# Altium PCB V1female.PcbDoc
Units mm, origin at the board's own origin, x right, y up, seen from the top; angles counter-clockwise.
Board outline 152.4 x 101.6 mm, 2 copper layers (Top Layer, Bottom Layer); 2 components, 2 nets, 18 pads, 42 vias.
Unrouted connection lines stored in the file: 4.
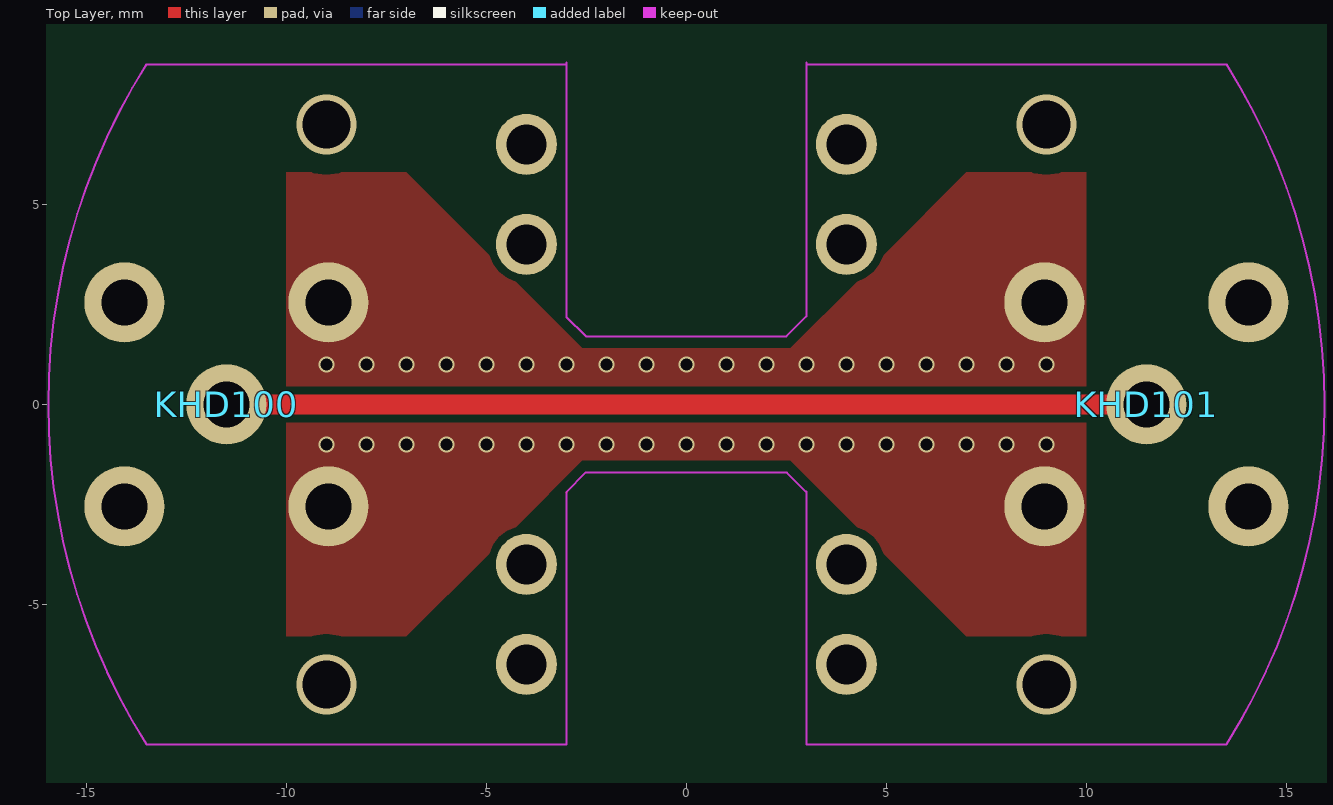
[diagram p0: Top Layer view]
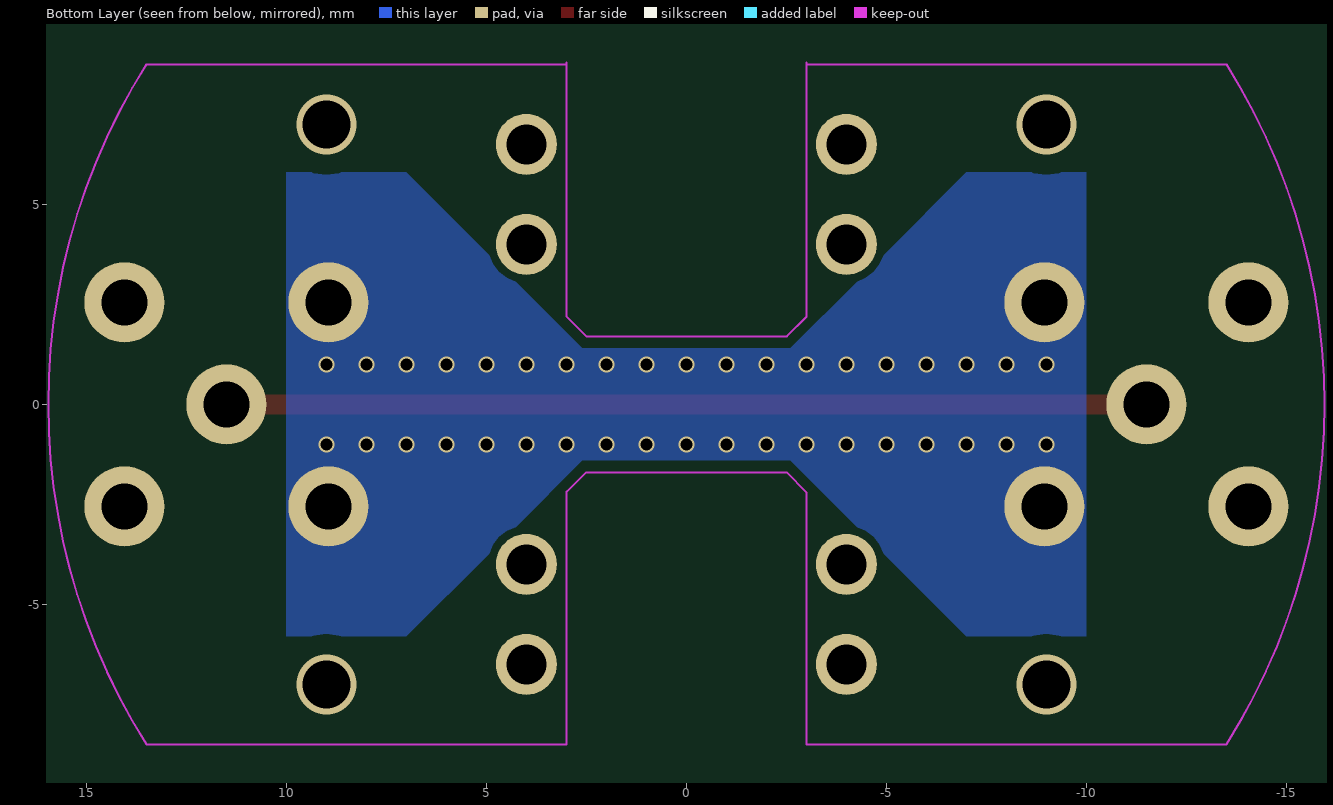
[diagram p1: Bottom Layer view, seen from below]

## Layer stack, top to bottom
Top Solder: solder mask 0.0102, Solder Resist, Dk 3.5
Top Layer: signal copper 0.0356
Dielectric1: dielectric 0.32, FR-4, Dk 4.8
Bottom Layer: signal copper 0.0356
Bottom Solder: solder mask 0.0102, Solder Resist, Dk 3.5

## Board outline
-74.041,-53.975 78.359,-53.975 78.359,47.625 -74.041,47.625

## Design rules (kind name [scope] priority, off if disabled: settings)
Clearance [All] p1: gap=0.2 ignorepadtopadclearanceinfootprint=FALSE except(0: Arc-Hole Track-Hole SMDPad-Hole THPad-Hole Via-Hole Fill-Hole Poly-Hole Region-Hole Text-Hole)
FabricationTestPointUsage TestPointUsage [All] p1: valid=0 allowmultiple=FALSE
FabricationTestpoint Testpoint [All] p1: side=3 testpointundercomponent=TRUE minsize=1.016 maxsize=2.54 preferedsize=1.524 minholesize=0 maxholesize=1.016 preferedholesize=0.813 testpointgrid=0.025 allowsidetop=TRUE allowsidebottom=TRUE usegrid=TRUE gridtolerance=0
HoleSize [All] p1: absolutevalues=TRUE maxlimit=2.54 minlimit=0.01 maxpercent=80.000 minpercent=20.000
HoleToHoleClearance [All] p1: gap=0.1 allowstackedmicrovias=TRUE
MinimumSolderMaskSliver [All] p1: minsoldermaskwidth=0.1
NetAntennae [All] p1: netantennaetolerance=0.1
PlaneConnect [All] p1: planeconnectstyle=Relief reliefexpansion=0.508 reliefentries=4 reliefconductorwidth=0.4 reliefairgap=0
PolygonConnect [All] p1: connectstyle=Direct reliefconductorwidth=0.254 reliefentries=4 polygonreliefangle="90 Angle" airgapwidth=0.254
RoutingVias [All] p1: holewidth=0.711 width=1.27 viastyle="Through Hole" minholewidth=0.05 minwidth=0.1 maxholewidth=0.711 maxwidth=1.27
SilkToSolderMaskClearance SilkscreenOverComponentPads [IsPad] p1: minsilkscreentomaskgap=0.254 clearancetoexposedcopper=TRUE
SolderMaskExpansion [All] p1: expansion=0
Width [All] p1: maxlimit=2 minlimit=0.1 preferedwidth=0.254
22 further rules are at their usual default settings.

## Components (designator, comment, footprint, x,y, rotation, side; value= is the part's Value field where it differs from the comment)
KHD100 "KHD100" 2.92-KHD100 -11.5,0 r0 top
KHD101 "KHD100" 2.92-KHD100 11.5,0 r0 top (schematic designator KHD100)

## Footprints (in the part's own frame and the unit in brackets; to place one, negate y for a bottom-side part, rotate by r counter-clockwise, add the part's x,y. Pads: shape width x height; smd on the part's side, far side on the other; paste and mask are expansions set on the pad)
2.92-KHD100 [mm]
  round 2 hole 1.15: 1(0,0) 2(-2.55,-2.55) 3(2.55,-2.55) 4(2.55,2.55) 5(-2.55,2.55)

## Free pads (board coordinates)
  round 1.524 hole 1: 4(4,-6.5) 6(4,6.5) 7(4,4) 8(-4,4) 9(-4,6.5) 10(-4,-4) 11(-4,-6.5) 12(4,-4)

## Via types
v1: diameter 0.4, hole 0.3, Top Layer to Bottom Layer, 38 vias
v2: diameter 1.5, hole 1.2, Top Layer to Bottom Layer, 4 vias

## Nets (pads, with @x,y where several pads share a name; then routed paths per layer and width w, separated by ;. In a path a pad name is that pad's centre, name@x,y a point inside that pad or via, vN(x,y) a via of type N, cw(c..) or ccw(c..) an arc to the next point about the centre after c; other vN are vias at no path point)
GND1: KHD100.2 KHD100.3 KHD100.4 KHD100.5 KHD101.2 KHD101.3 KHD101.4 KHD101.5
  other v1: -9,-1 -8,-1 -7,-1 -6,-1 -5,-1 -4,-1 -3,-1 -2,-1 -1,-1 0,-1 1,-1 2,-1 3,-1 4,-1 5,-1 6,-1 7,-1 8,-1 9,-1 -9,1 -8,1 -7,1 -6,1 -5,1 -4,1 -3,1 -2,1 -1,1 0,1 1,1 2,1 3,1 4,1 5,1 6,1 7,1 8,1 9,1
GND2: KHD100.1 KHD101.1 | length 23
  Top Layer w0.5: KHD100.1 KHD101.1
copper on no net: | length 0
  other v2: -9,-7 9,-7 -9,7 9,7

## Polygon pours and split planes (outlines as drawn)
GND1 on Top Layer "Bottom Layer-No Net" (solid, pour order 1020): -7,5.8 -2.6,1.4 2.6,1.4 7,5.8 10,5.8 10,0.4 -10,0.4 -10,5.8
GND1 on Top Layer "Bottom Layer-No Net" (solid, pour order 1022): -7,-5.8 -2.6,-1.4 2.6,-1.4 7,-5.8 10,-5.8 10,-0.4 -10,-0.4 -10,-5.8
GND1 on Bottom Layer "Bottom Layer-No Net" (solid, pour order 1024): -10,5.8 -7,5.8 -2.6,1.4 2.6,1.4 7,5.8 10,5.8 10,-5.8 7,-5.8 2.6,-1.4 -2.6,-1.4 -7,-5.8 -10,-5.8

## Keep-outs
Keep-Out Layer:
  lines w0.05: -3,-8.5 -13.5,-8.5 cw(c0,0) -13.5,8.5 -3,8.5 ; -3,-2.2 -2.512,-1.7 2.512,-1.7 ; 2.5,-1.7 3,-2.2 ; 3,-8.5 13.5,-8.5 ccw(c0,0) 13.5,8.5 3,8.5
  lines w0.056: -3,-8.5 -3,-2.2 ; -3,2.184 -2.512,1.7 -1.675,1.7 -0.3,1.7 0.6,1.7 2.5,1.7 3,2.2 3,3.3 3,3.8 3,4 3,4.8 3,5.925 3,8 3,8.541 ; -3,2.2 -3,6.05 ; -3,6 -3,6.7 ; -3,6.6 -3,8.55 ; 3,-8.5 3,-2.175